# Altium PCB REACTION-CIRCUIT.PcbDoc
Units mm, origin at the board's own origin, x right, y up, seen from the top; angles counter-clockwise.
Board outline 151 x 101.09 mm, 2 copper layers (Top Layer, Bottom Layer); 90 components, 81 nets, 357 pads, 0 vias.
Unrouted connection lines stored in the file: 4.
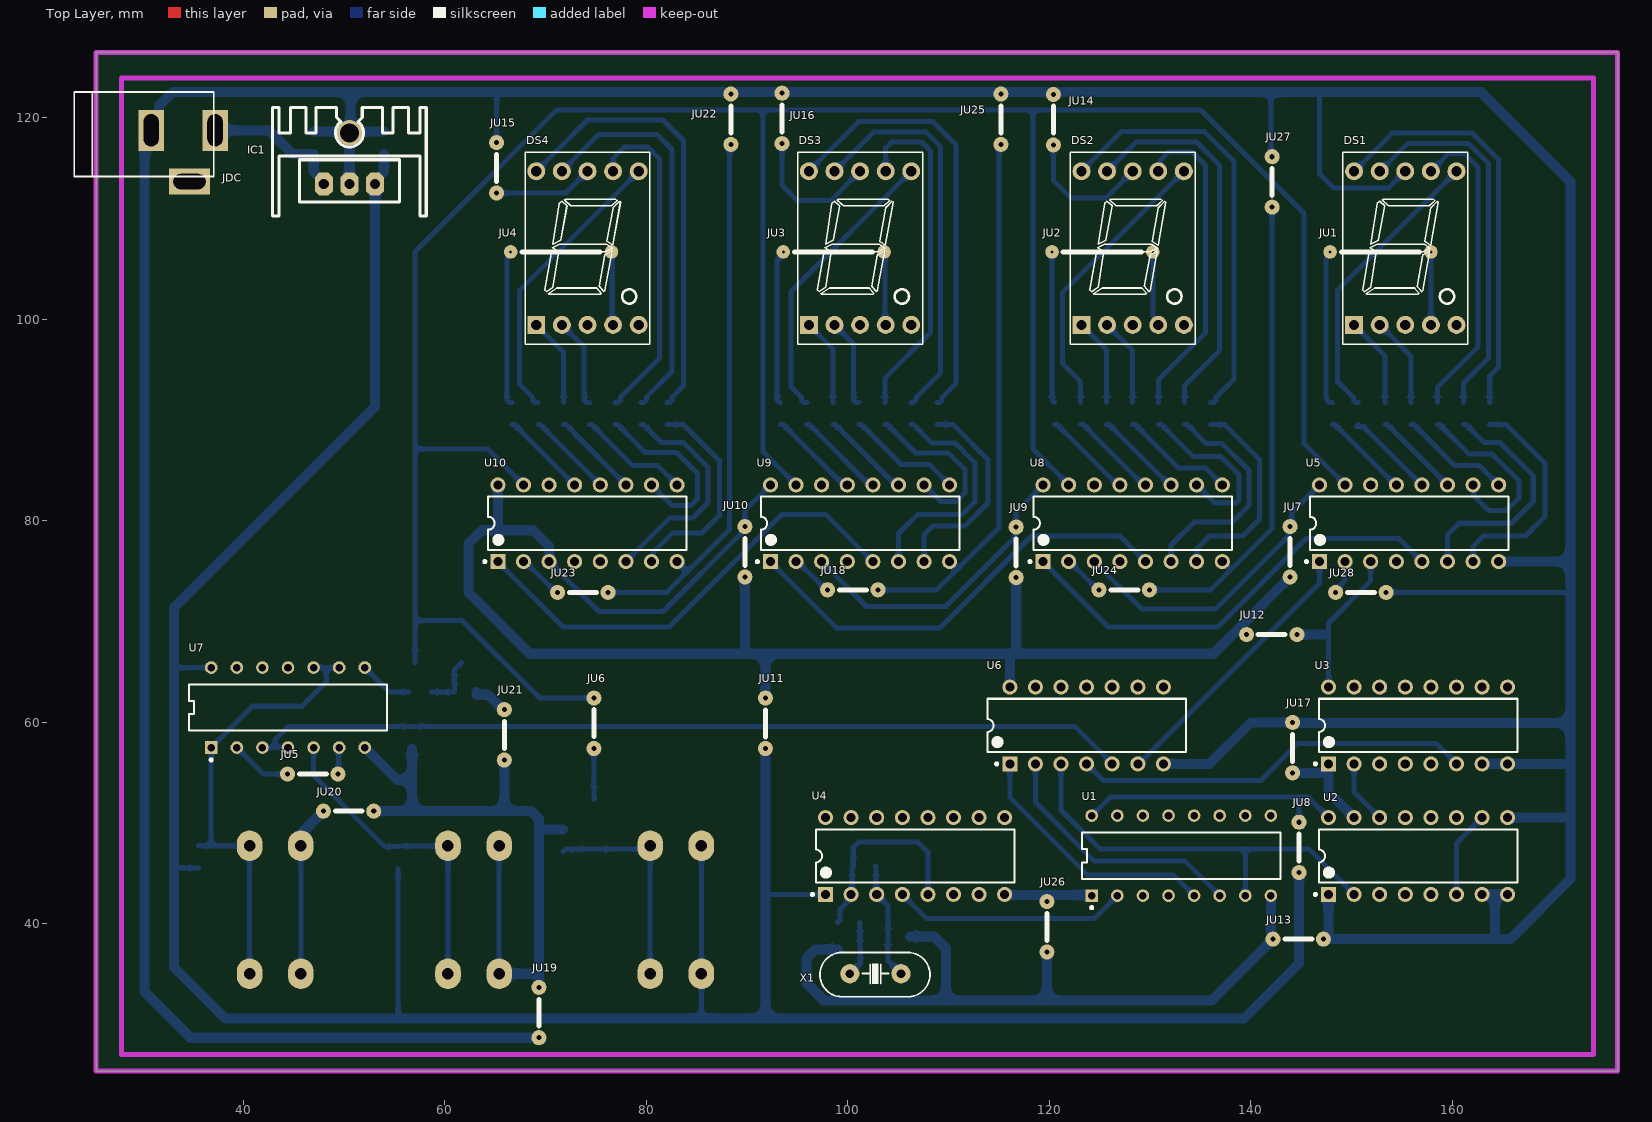
[diagram p0: Top Layer view]
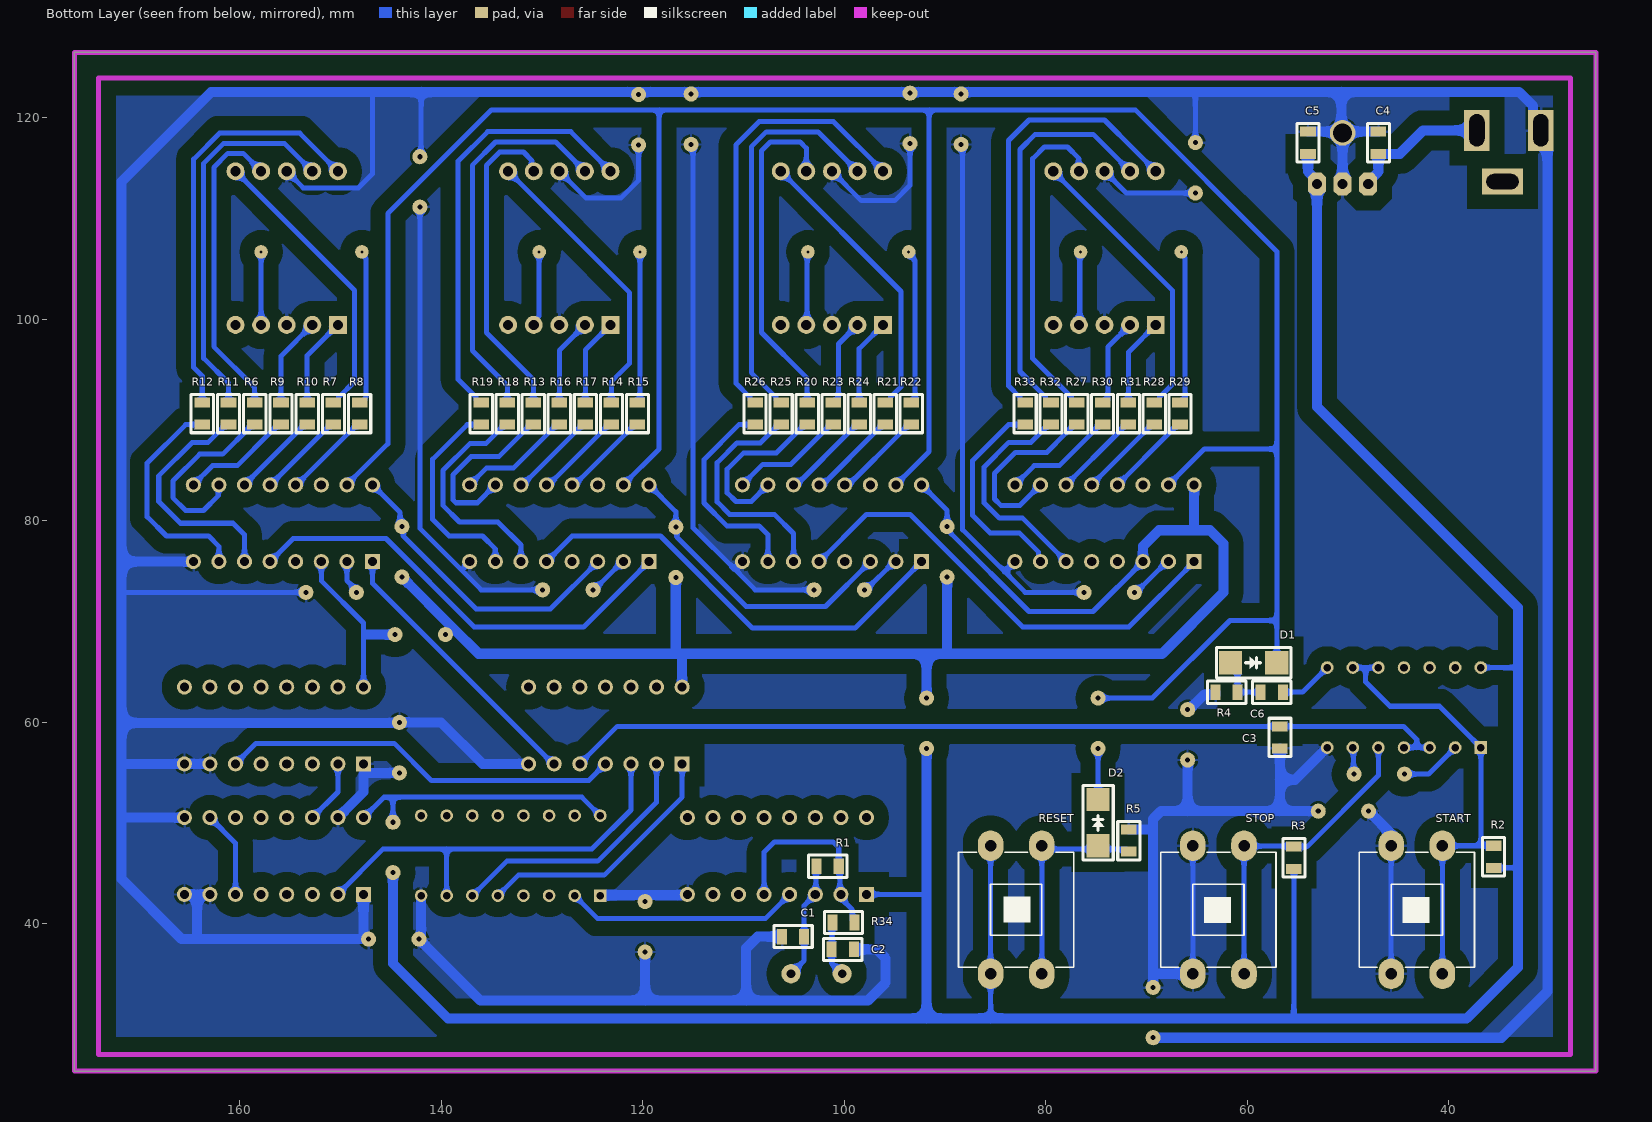
[diagram p1: Bottom Layer view, seen from below]
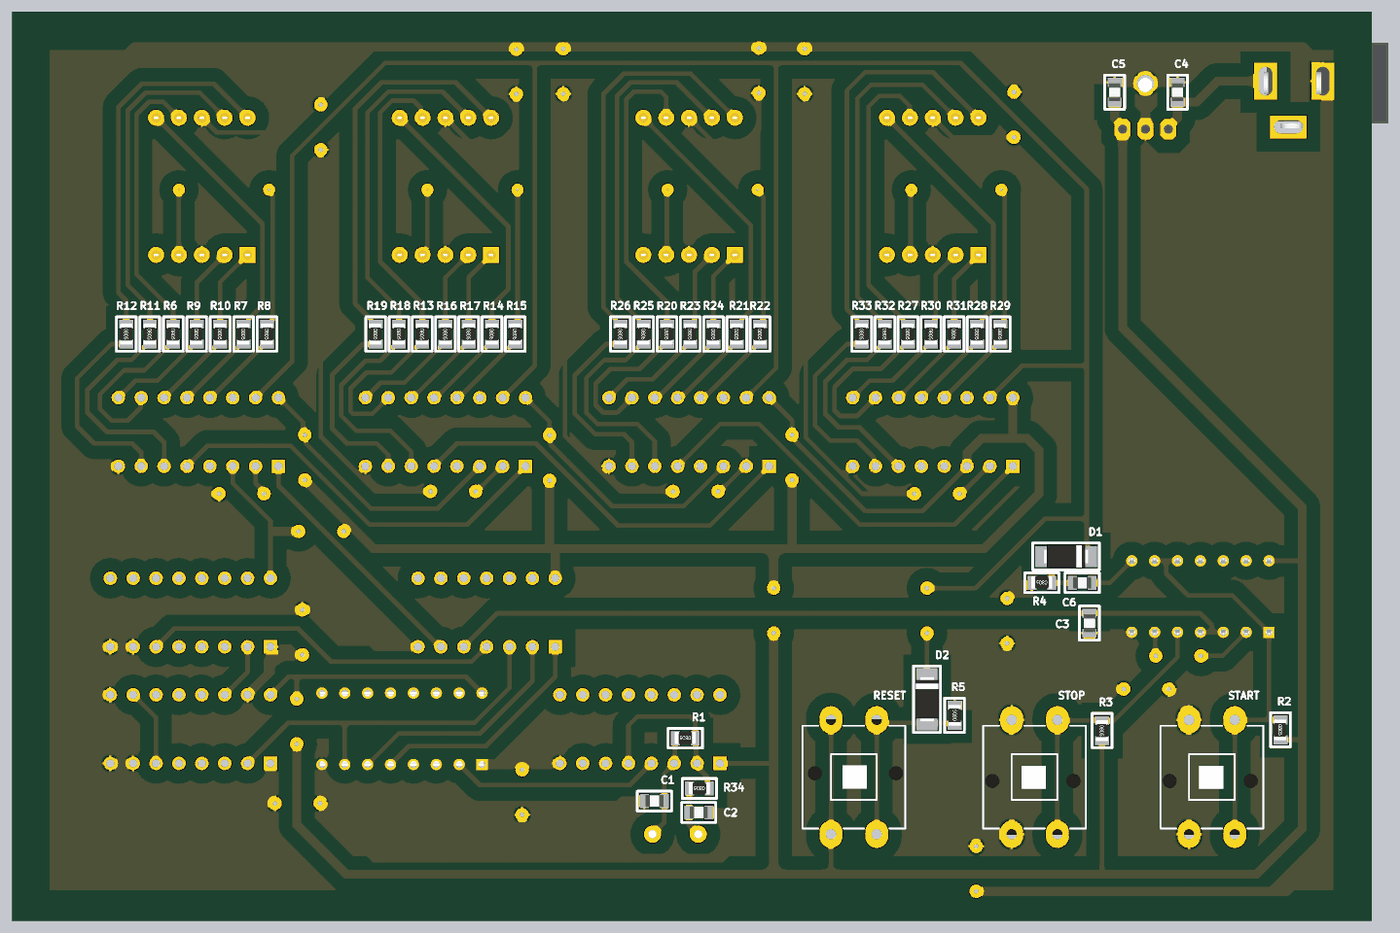
[diagram p2: 3D render of the assembled board from below, using the file's embedded part models]

## Layer stack, top to bottom
Top Solder: solder mask 0.0102, Solder Resist, Dk 3.5
Top Layer: signal copper 0.0356
Dielectric 1: dielectric 0.32, FR-4, Dk 4.8
Bottom Layer: signal copper 0.0356
Bottom Solder: solder mask 0.0102, Solder Resist, Dk 3.5

## Board outline
25.4,25.4 176.403,25.4 176.403,126.492 25.4,126.492

## Design rules (kind name [scope] priority, off if disabled: settings)
Clearance [All] p1: gap=0.5 ignorepadtopadclearanceinfootprint=FALSE
PolygonConnect [All] p1: connectstyle=Relief reliefconductorwidth=0.254 reliefentries=4 polygonreliefangle="90 Angle" airgapwidth=0.254
RoutingVias [All] p1: holewidth=1 width=1.5 viastyle="Through Hole" minholewidth=1 minwidth=1.5 maxholewidth=1 maxwidth=1.5
SolderMaskExpansion [All] p1: expansion=0.102 istentingtop=FALSE
Width [All] p1: maxlimit=1 minlimit=0.4 preferedwidth=0.5
30 further rules are at their usual default settings.

## Classes and differential pairs
component class REACTION-CIRCUIT: JU1 JU2 JU3 JU4 JU5 JU6 JU7 JU8 JU9 JU10 JU11 JU12 JU13 JU14 JU15 JU16 JU17 JU18 JU19 JU20 JU21 JU22 JU23 JU24 JU25 JU26 JU27 JU28
component class REACTION-CIRCUIT-DISPLAY.SchDoc: DS1 DS2 DS3 DS4 R6 R7 R8 R9 R10 R11 R12 R13 R14 R15 R16 R17 R18 R19 R20 R21 R22 R23 R24 R25 R26 R27 R28 R29 R30 R31 R32 R33 U5 U8 U9 U10
component class REACTION-CIRCUIT-CONTROL.SchDoc: C1 C2 C3 C4 C5 C6 D1 D2 IC1 JDC R1 R2 R3 R4 R5 R34 RESET START STOP U1 U2 U3 U4 U6 U7 X1

## Components (designator, comment, footprint, x,y, rotation, side; value= is the part's Value field where it differs from the comment)
C1 "33pF/50V" "Cap 0805(2012)" 106.172,38.735 r180 bottom
C2 "33pF/50V" "Cap 0805(2012)" 99.048,37.465 r0 bottom
C3 "100nF/50V" "Cap 0805(2012)" 56.769,57.404 r90 bottom
C4 "10uF/50V" "Cap 0805(2012)" 46.99,118.618 r270 bottom
C5 "1uF/50V" "Cap 0805(2012)" 53.975,118.618 r270 bottom
C6 "22nF/50V" "Cap 0805(2012)" 58.669,62.992 r180 bottom
D1 "1N4007" 1N4007 61.669,65.913 r180 bottom
D2 "1N4007" 1N4007 74.803,47.752 r90 bottom
DS1 "7SEG" LED7SEG-1-0.56 155.194,106.426 r0 top
DS2 "7SEG" LED7SEG-1-0.56 128.143,106.426 r0 top
DS3 "7SEG" LED7SEG-1-0.56 101.092,106.426 r0 top
DS4 "7SEG" LED7SEG-1-0.56 74.041,106.426 r0 top
IC1 "LM7805" QTO-220H3 48.006,113.411 r0 top
JDC "Jac DC" DC-IN 34.036,116.205 r0 top
JU1 "JUMPER 5MM" "JUMPER 10MM" 157.861,106.68 r180 top
JU2 "JUMPER 5MM" "JUMPER 10MM" 130.269,106.68 r180 top
JU3 "JUMPER 5MM" "JUMPER 10MM" 103.599,106.68 r180 top
JU4 "JUMPER 5MM" "JUMPER 10MM" 76.548,106.68 r180 top
JU5 "JUMPER 5MM" "JUMPER 5MM" 49.403,54.864 r180 top
JU6 "JUMPER 5MM" "JUMPER 5MM" 74.803,62.404 r270 top
JU7 "JUMPER 5MM" "JUMPER 5MM" 143.891,74.422 r90 top
JU8 "JUMPER 5MM" "JUMPER 5MM" 144.78,45.085 r90 top
JU9 "JUMPER 5MM" "JUMPER 5MM" 116.713,74.375 r90 top
JU10 "JUMPER 5MM" "JUMPER 5MM" 89.789,74.422 r90 top
JU11 "JUMPER 5MM" "JUMPER 5MM" 91.821,57.404 r90 top
JU12 "JUMPER 5MM" "JUMPER 5MM" 139.573,68.707 r0 top
JU13 "JUMPER 5MM" "JUMPER 5MM" 147.193,38.481 r180 top
JU14 "JUMPER 5MM" "JUMPER 5MM" 120.396,122.301 r270 top
JU15 "JUMPER 5MM" "JUMPER 5MM" 65.151,112.522 r90 top
JU16 "JUMPER 5MM" "JUMPER 5MM" 93.472,117.428 r90 top
JU17 "JUMPER 5MM" "JUMPER 5MM" 144.145,54.991 r90 top
JU18 "JUMPER 5MM" "JUMPER 5MM" 102.997,73.152 r180 top
JU19 "JUMPER 5MM" "JUMPER 5MM" 69.342,28.702 r90 top
JU20 "JUMPER 5MM" "JUMPER 5MM" 52.959,51.181 r180 top
JU21 "JUMPER 5MM" "JUMPER 5MM" 65.913,56.261 r90 top
JU22 "JUMPER 5MM" "JUMPER 5MM" 88.392,117.348 r90 top
JU23 "JUMPER 5MM" "JUMPER 5MM" 76.2,72.898 r180 top
JU24 "JUMPER 5MM" "JUMPER 5MM" 129.921,73.152 r180 top
JU25 "JUMPER 5MM" "JUMPER 5MM" 115.189,117.348 r90 top
JU26 "JUMPER 5MM" "JUMPER 5MM" 119.761,37.211 r90 top
JU27 "JUMPER 5MM" "JUMPER 5MM" 142.113,111.125 r90 top
JU28 "JUMPER 5MM" "JUMPER 5MM" 153.416,72.898 r180 top
R1 "10K/0805" "Res 0805(2012)" 101.643,45.72 r0 bottom
R2 "10K/0805" "Res 0805(2012)" 35.56,46.652 r270 bottom
R3 "10K/0805" "Res 0805(2012)" 55.372,46.566 r270 bottom
R4 "10K/0805" "Res 0805(2012)" 62.06,62.992 r0 bottom
R5 "10K/0805" "Res 0805(2012)" 71.755,48.262 r90 bottom
R6 "330R/0805" "Res 0805(2012)" 158.496,90.635 r270 bottom
R7 "330R/0805" "Res 0805(2012)" 150.685,90.635 r270 bottom
R8 "330R/0805" "Res 0805(2012)" 148.082,90.635 r270 bottom
R9 "330R/0805" "Res 0805(2012)" 155.892,90.635 r270 bottom
R10 "330R/0805" "Res 0805(2012)" 153.289,90.635 r270 bottom
R11 "330R/0805" "Res 0805(2012)" 161.099,90.635 r270 bottom
R12 "330R/0805" "Res 0805(2012)" 163.703,90.635 r270 bottom
R13 "330R/0805" "Res 0805(2012)" 130.852,90.635 r270 bottom
R14 "330R/0805" "Res 0805(2012)" 123.105,90.635 r270 bottom
R15 "330R/0805" "Res 0805(2012)" 120.523,90.635 r270 bottom
R16 "330R/0805" "Res 0805(2012)" 128.27,90.635 r270 bottom
R17 "330R/0805" "Res 0805(2012)" 125.688,90.635 r270 bottom
R18 "330R/0805" "Res 0805(2012)" 133.435,90.635 r270 bottom
R19 "330R/0805" "Res 0805(2012)" 136.017,90.635 r270 bottom
R20 "330R/0805" "Res 0805(2012)" 103.674,90.635 r270 bottom
R21 "330R/0805" "Res 0805(2012)" 95.927,90.635 r270 bottom
R22 "330R/0805" "Res 0805(2012)" 93.345,90.635 r270 bottom
R23 "330R/0805" "Res 0805(2012)" 101.092,90.635 r270 bottom
R24 "330R/0805" "Res 0805(2012)" 98.51,90.635 r270 bottom
R25 "330R/0805" "Res 0805(2012)" 106.257,90.635 r270 bottom
R26 "330R/0805" "Res 0805(2012)" 108.839,90.635 r270 bottom
R27 "330R/0805" "Res 0805(2012)" 76.92,90.635 r270 bottom
R28 "330R/0805" "Res 0805(2012)" 69.236,90.635 r270 bottom
R29 "330R/0805" "Res 0805(2012)" 66.675,90.635 r270 bottom
R30 "330R/0805" "Res 0805(2012)" 74.358,90.635 r270 bottom
R31 "330R/0805" "Res 0805(2012)" 71.797,90.635 r270 bottom
R32 "330R/0805" "Res 0805(2012)" 79.481,90.635 r270 bottom
R33 "330R/0805" "Res 0805(2012)" 82.042,90.635 r270 bottom
R34 "470R/0805" "Res 0805(2012)" 100.076,40.132 r0 bottom
RESET "SW" SW4B 85.471,47.752 r270 bottom value="Button chip 4 pin"
START "SW" SW4B 40.64,35.052 r90 bottom value="Button chip 4 pin"
STOP "SW" SW4B 60.325,35.052 r90 bottom value="Button chip 4 pin"
U1 "CD4520BE" FP-N0016A-MFG 133.096,46.769 r90 top
U2 "CD4518BE" N0016A 156.591,46.736 r90 top
U3 "CD4518BE" N0016A 156.591,59.69 r90 top
U4 "CD4049UBE" N0016A 106.68,46.736 r90 top
U5 "CD4026BE" N0016A 155.702,79.756 r90 top
U6 "SN74HC08N" N0014A 123.698,59.69 r90 top
U7 "SN74HC00N" FP-N0014A-MFG 44.45,61.468 r90 top
U8 "CD4026BE" N0016A 128.27,79.756 r90 top
U9 "CD4026BE" N0016A 101.219,79.756 r90 top
U10 "CD4026BE" N0016A 74.168,79.756 r90 top
X1 "12Mhz" XT2 102.743,35.052 r180 top value=4Mhz

## Footprints (in the part's own frame and the unit in brackets; to place one, negate y for a bottom-side part, rotate by r counter-clockwise, add the part's x,y. Pads: shape width x height; smd on the part's side, far side on the other; paste and mask are expansions set on the pad)
1N4007 [mm] "DO-214AC"
  rect 2.3x2.3 smd mask+0.05: 1(0,0) 2(4.6,0)
  silkscreen extent -1.4,-1.5 6,1.5, body extent -0.2,-1.35 4.8,1.35, height 2.15
"Cap 0805(2012)" [mm] "Capacitor 0805"
  rect 1x1.55 smd mask+0.1: 1(0,0) 2(2.2,0)
  silkscreen extent -0.8,-1.1 3,1.1, body extent 0.1,-0.65 2.1,0.66, height 0.73
DC-IN [mm] "Jac DC input"
  rect 2.54x4.064 hole 1.5 slot 3.2 at 90 deg: 1(3.175,2.54) 2(-3.175,2.54)
  rect 4.064x2.54 hole 1.5 slot 3.2 at 0 deg: 3(0.635,-2.54)
  silkscreen extent -10.79,-2.03 3.05,6.35, body extent -10.42,-2.67 3.4,6.84, height 11.02
FP-N0014A-MFG [mm]
  rect 1.25x1.25 hole 0.75 paste-1000 mask+0: 1(-3.97,7.62)
  round 1.25 hole 0.75 paste-1000 mask+0: 2(-3.97,5.08) 3(-3.97,2.54) 4(-3.97,0) 5(-3.97,-2.54) 6(-3.97,-5.08) 7(-3.97,-7.62) 8(3.97,-7.62) 9(3.97,-5.08) 10(3.97,-2.54) 11(3.97,0) 12(3.97,2.54) 13(3.97,5.08) 14(3.97,7.62)
  silkscreen extent -5.32,-9.85 2.3,9.85, body extent -4.69,-9.94 4.7,9.94, height 0.25
FP-N0016A-MFG [mm]
  rect 1.25x1.25 hole 0.75 paste-1000 mask+0: 1(-3.97,8.89)
  round 1.25 hole 0.75 paste-1000 mask+0: 2(-3.97,6.35) 3(-3.97,3.81) 4(-3.97,1.27) 5(-3.97,-1.27) 6(-3.97,-3.81) 7(-3.97,-6.35) 8(-3.97,-8.89) 9(3.97,-8.89) 10(3.97,-6.35) 11(3.97,-3.81) 12(3.97,-1.27) 13(3.97,1.27) 14(3.97,3.81) 15(3.97,6.35) 16(3.97,8.89)
  silkscreen extent -5.27,-9.84 2.3,9.84, body extent -4.69,-9.94 4.69,9.94, height 0.25
"JUMPER 5MM" [mm]
  round 1.5 hole 0.5: 1(0,0) 2(5,0)
  silkscreen extent 1.14,0 3.81,0
"JUMPER 10MM" [mm]
  round 1.35 hole 0.3: 1(0,0) 2(10,0)
  silkscreen extent 1.14,0 8.89,0
LED7SEG-1-0.56 [mil]
  rect 70x70 hole 40: 1(-195,-275)
  round 70 hole 40: 2(-95,-275) 3(5,-275) 4(105,-275) 5(205,-275) 6(205,325) 7(105,325) 8(5,325) 9(-95,325) 10(-195,325)
  silkscreen extent -239,-350 249,400, body extent -241,-349 251,399, height 315
N0014A [mm] "DIP, 14-Leads, Body 19.7x6.6mm, Pitch 2.54mm"
  rect 1.5x1.5 hole 0.9: 1(-3.81,7.62)
  round 1.5 hole 0.9: 2(-3.81,5.08) 3(-3.81,2.54) 4(-3.81,0) 5(-3.81,-2.54) 6(-3.81,-5.08) 7(-3.81,-7.62) 8(3.81,-7.62) 9(3.81,-5.08) 10(3.81,-2.54) 11(3.81,0) 12(3.81,2.54) 13(3.81,5.08) 14(3.81,7.62)
  silkscreen extent -3.93,-9.85 2.65,9.85, body extent -3.95,-9.85 3.95,9.85, height 5.08
N0016A [mm] "DIP, 16-Leads, Body 19.7x6.6mm, Pitch 2.54mm"
  rect 1.5x1.5 hole 0.9: 1(-3.81,8.89)
  round 1.5 hole 0.9: 2(-3.81,6.35) 3(-3.81,3.81) 4(-3.81,1.27) 5(-3.81,-1.27) 6(-3.81,-3.81) 7(-3.81,-6.35) 8(-3.81,-8.89) 9(3.81,-8.89) 10(3.81,-6.35) 11(3.81,-3.81) 12(3.81,-1.27) 13(3.81,1.27) 14(3.81,3.81) 15(3.81,6.35) 16(3.81,8.89)
  silkscreen extent -3.93,-9.85 2.65,10.31, body extent -3.95,-9.85 3.95,9.85, height 5.08
QTO-220H3 [mil] "TO-220 1-2-3"
  oct 70x90 hole 40: 1(0,0) 2(100,0) 3(200,0)
  round 100 hole 75: 2(100,200)
  silkscreen extent -200,-125 400,300, body extent -190,-102 392,323, height 984
"Res 0805(2012)" [mm] "Resistor 0805"
  rect 1x1.55 smd mask+0.1: 1(-1.1,0) 2(1.1,0)
  silkscreen extent -1.91,-1.1 1.9,1.1, body extent -1.15,-0.69 1.15,0.66, height 0.76
SW4B [mil] "SW button 4pin, 450 x 450 mil"
  oval 120x100 hole 45: 1(0,200) 2(500,0) 3(500,200) 4(0,0)
  silkscreen extent 25,-125 475,325, body extent -3,-129 469,343, height 169
XT2 [mil] "Footpin for Crystal 2 pin"
  round 75 hole 34: 1(-100,0) 2(100,0)
  silkscreen extent -213,-83 217,90, body extent -216,-87 216,90, height 144

## Part data
C1 C2 C3 C4 C5 C6: library part CAP_CER_1nF_50V_NPOL, "Ceramic Capacitor 1nF/50V (+-20% TH)/(+10%SMD)"
D1 D2: "Diode LS 1A 1000V DO-41"
DS1 DS2 DS3 DS4: library part LED7SEG-1, "14.2 mm General Purpose Blue 7-Segment Display: CC, RH DP, Gray Surface", Colour=Blue, PackageDocument=24-Sep-2002, ComponentLink1Description="Manufacturer Link", ComponentLink1URL=http://www.agilent.com/, DatasheetDocument=24-Sep-2002, LatestRevisionDate=17-Dec-2003, LatestRevisionNote="Schematic revised, PCB Footprint replaced.", MinimumIntensity="2020 ucd", Note="IF = 10 mA", PackageReference=H, Published=8-Jun-2000, Publisher="Altium Limited"
IC1: library part LM78xx, "On ap +, from + 5 to + 24VDC"
JDC: library part DCIN, "Jac DC input"
R1 R2 R3 R4 R5 R6 R7 R8 R9 R10 R11 R12 R13 R14 R15 R16 R17 R18 R19 R20 R21 R22 R23 R24 R25 R26 R27 R28 R29 R30 R31 R32 R33 R34: library part "Resistor 0805", "Resistor 0805"
RESET START STOP: library part SW4, "Switch button 4 pin"
U1: library part CMP-1623-00555-3, "IC DUAL BINARY UP COUNTER 16-DIP", Case/Package=PDIP, Frequency=8MHz, Input Capacitance=5pF, Max Operating Temperature=125°C, Max Supply Voltage=18V, Min Operating Temperature=-55°C, Min Supply Voltage=3V, Package Quantity=25, Power Dissipation=500mW, Quiescent Current=100uA, Contact Plating=Gold, Direction=Up, Lead Free="Lead Free", Logic Function=Counter, Mount="Through Hole", Number of Bits=4, Number of Bits per Element=4, Number of Circuits=2, Number of Elements=2, Number of Pins=16, Packaging=Rail/Tube, Propagation Delay=650ns, Radiation Hardening=No, REACH SVHC="No SVHC", Reset=Asynchronous, RoHS Compliant=Yes, Sync/Async=Synchronous, Turn-On Delay Time=650ns, Weight=0.03357oz
U2 U3: library part CMP-1623-00558-2, "CMOS Dual BCD Up-Counter, N0016A, TUBE", F @ Nom Voltage(Max)(Mhz)=8, Generic Part Number=CD4518B, ICC @ Nom Voltage(Max)(mA)=0.03, Manufacturer="Texas Instruments", Operating Temperature Range(C)="-55 to 125", Rating=Catalog, tpd @ Nom Voltage(Max)(ns)=230, Voltage(Nom)(V)=5,10,15, Bits(#)=4, Code_JEDEC=MS-001, DatasheetVersion=SCHS076D, Function=Counter, Input Type=CMOS, Inputs=1, Output Drive (IOL/IOH)(Max)(mA)=1.5/-1.5, Output Type=CMOS, PackageReference=N0016A, Schmitt Trigger=No, Technology Family=CD4000, Type=Other, VCC(Max)(V)=18, VCC(Min)(V)=3
U4: library part CMP-1615-00914-2, "CMOS Hex Inverting Buffer/Converter, N0016A, TUBE", F @ Nom Voltage(Max)(Mhz)=12, Generic Part Number=CD4049UB, ICC @ Nom Voltage(Max)(mA)=0.03, Manufacturer="Texas Instruments", Operating Temperature Range(C)="-55 to 125", Rating=Military, tpd @ Nom Voltage(Max)(ns)=120, Voltage(Nom)(V)=5, Bits(#)=6, Code_JEDEC=MS-001, DatasheetVersion=SCHS046I, Input Type=CMOS, Output Drive (IOL/IOH)(Max)(mA)=-1.2/5.2, Output Type=CMOS, PackageReference=N0016A, Schmitt Trigger=No, Technology Family=CD4000, VCC(Max)(V)=18, VCC(Min)(V)=3
U5 U8 U9 U10: library part CMP-1623-00561-2, "CMOS Decade Counter/Divider with Decoded 7-Segment Display Outputs and Display Enable, N0016A, TUBE", F @ Nom Voltage(Max)(Mhz)=8, Generic Part Number=CD4026B, ICC @ Nom Voltage(Max)(mA)=0.03, Manufacturer="Texas Instruments", Operating Temperature Range(C)="-55 to 125", Rating=Catalog, tpd @ Nom Voltage(Max)(ns)=250, Voltage(Nom)(V)=5,10,15, Bits(#)=7, Code_JEDEC=MS-001, DatasheetVersion=SCHS031B, Function=Counter, Input Type=CMOS, Inputs=1, Output Drive (IOL/IOH)(Max)(mA)=1.5/-1.5, Output Type=CMOS, PackageReference=N0016A, Schmitt Trigger=No, Technology Family=CD4000, Type=Decade, VCC(Max)(V)=18, VCC(Min)(V)=3
U6: library part CMP-0777-00250-3, "Quadruple 2-Input Positive-AND Gates, N0014A, TUBE", F @ Nom Voltage(Max)(Mhz)=70, Generic Part Number=SN74HC08, ICC @ Nom Voltage(Max)(mA)=0.02, Manufacturer="Texas Instruments", Operating Temperature Range(C)="-40 to 85", Rating=Catalog, tpd @ Nom Voltage(Max)(ns)=28, Voltage(Nom)(V)=5, Bits(#)=4, DatasheetVersion=SCLS081F, Input Type=CMOS, Output Type=CMOS, PackageReference=N0014A, Schmitt Trigger=No, Technology Family=HC, VCC(Max)(V)=6, VCC(Min)(V)=2
U7: library part CMP-1627-00482-3, "IC GATE NAND 4CH 2-INP 14DIP", Case/Package=PDIP, High Level Output Current=-5.2mA, Low Level Output Current=5.2mA, Max Operating Temperature=85°C, Max Output Current=4mA, Max Supply Voltage=6V, Min Operating Temperature=-40°C, Min Supply Voltage=2V, Operating Supply Voltage=5V, Package Quantity=25, Quiescent Current=2uA, Contact Plating=Gold, Height=4.57mm, Lead Free="Lead Free", Length=19.3mm, Logic Function=NAND, Mount="Through Hole", Number of Bits=4, Number of Circuits=4, Number of Elements=4, Number of Gates=4, Number of Input Lines=2, Number of Inputs=2, Number of Output Lines=1, Number of Outputs=1, Number of Pins=14, Output Current=5.2mA, Packaging=Rail/Tube, Propagation Delay=15ns, Radiation Hardening=No, REACH SVHC="No SVHC", Schmitt Trigger Input=No, Turn-On Delay Time=20ns, Weight=0.032734oz, Width=6.35mm
X1: library part XT2, "Crystal, 32.768 KHz, -40 to 85 degC, 3.2 x 1.5 x 0.9 mm SMD"

## Nets (pads, with @x,y where several pads share a name; then routed paths per layer and width w, separated by ;. In a path a pad name is that pad's centre, name@x,y a point inside that pad or via, vN(x,y) a via of type N, cw(c..) or ccw(c..) an arc to the next point about the centre after c; other vN are vias at no path point)
5V: C5.2 IC1.3 JU7.1 JU7.2 JU8.1 JU8.2 JU9.1 JU9.2 JU10.1 JU10.2 JU11.1 JU11.2 JU12.1 JU12.2 R2.2 R3.2 RESET.2 RESET.4 U1.16 U2.16 U3.16 U4.1 U5.3 U5.16 U6.14 U7.14 U8.3 U8.16 U9.3 U9.16 U10.3 U10.16 | length 552.6
  Bottom Layer w0.5: 33.147,45.552 R2.2 ; 33.147,65.438 U7.14 ; 55.372,30.607 R3.2 ; U10.3 75.311,70.993 81.661,70.993 89.379,78.711 89.379,78.741 89.789,79.151 89.789,81.026 U9.16 ; 85.471,30.607 RESET.2 RESET.4 ; 91.821,43.053 91.948,42.926 U4.1 ; U9.3 101.854,71.501 109.728,71.501 116.597,78.37 116.597,79.259 JU9.2 116.713,80.899 U8.16 ; U1.16 126.045,52.578 144.78,52.578 ; U8.3 129.159,71.247 136.525,71.247 143.735,78.457 143.735,79.266 144.082,79.613 144.082,80.836 U5.16 ; JU8.2 144.78,52.578 ; U2.16 145.669,52.578 144.78,52.578 ; U3.16 147.701,69.85 151.892,74.041 U5.3
  Bottom Layer w1: C5.2 53.975,114.64 53.086,113.751 IC1.3 53.086,91.313 33.147,71.374 33.147,65.438 33.147,45.552 33.147,35.687 38.227,30.607 55.372,30.607 85.471,30.607 91.821,30.607 ; U10.16 65.278,79.184 65.151,79.057 ; U10.3 70.358,77.47 68.77,79.057 65.151,79.057 ; JU10.1 89.789,67.183 90.17,66.802 ; JU11.1 91.821,43.053 91.821,30.607 ; JU11.2 91.791,62.434 91.821,62.465 91.821,66.802 ; U6.14 116.078,66.802 ; JU9.1 116.713,66.929 116.586,66.802 ; JU12.1 139.446,68.707 138.811,69.342 ; JU7.1 138.811,69.342 ; JU12.2 147.447,68.707 ; JU8.1 144.78,36.068 139.319,30.607 91.821,30.607 ; 65.151,79.057 63.691,79.057 62.357,77.724 62.357,72.898 68.453,66.802 89.789,66.802 90.17,66.802 ; 90.17,66.802 91.821,66.802 ; 91.821,66.802 116.078,66.802 ; 116.078,66.802 116.586,66.802 ; 116.586,66.802 136.271,66.802 138.811,69.342
12V: C4.2 IC1.1 JDC.1 | length 14.2
  Bottom Layer w1: JDC.1 42.545,118.745 44.872,116.418 C4.2 46.99,114.64 48.006,113.624 IC1.1
CLK_1KHz: U5.1 U6.6 | length 27.6
  Bottom Layer w0.5: U6.6 128.905,55.88 146.812,73.787 U5.1
CLK_12MHz: U1.2 U4.4 | length 23.3
  Bottom Layer w0.5: U4.4 107.823,40.513 124.46,40.513 U1.2
GND: C1.1 C2.1 C3.1 C4.1 C5.1 DS1.3 DS1.8 DS2.3 DS2.8 DS3.3 DS3.8 DS4.3 DS4.8 IC1.2 JDC.2 JU13.1 JU13.2 JU14.1 JU14.2 JU15.1 JU15.2 JU16.1 JU16.2 JU17.1 JU17.2 JU18.1 JU18.2 JU19.1 JU19.2 JU20.1 JU20.2 JU21.1 JU21.2 JU22.1 JU22.2 JU23.1 JU23.2 JU24.1 JU24.2 JU25.1 JU25.2 JU26.1 JU26.2 JU27.1 JU27.2 JU28.1 JU28.2 R4.2 R5.2 START.1 START.3 STOP.1 STOP.3 U1.1 U1.8 U2.1 U2.7 U2.8 U2.9 U2.15 U3.1 U3.7 U3.8 U4.8 U5.2 U5.8 U6.7 U7.7 U8.2 U8.8 U9.2 U9.8 U10.2 U10.8 | length 901.4
  Bottom Layer w0.5: START.1 START.3 ; JU15.1 72.009,112.522 DS4.8 ; JU15.2 65.151,122.555 ; STOP.1 STOP.3 ; U10.2 67.985,75.946 71.033,72.898 JU23.2 ; JU23.1 82.042,72.898 84.074,74.93 ; U10.8 84.074,74.93 ; JU22.1@88.249,117.586 88.249,79.105 84.074,74.93 ; JU16.1 93.472,113.284 94.996,111.76 98.298,111.76 DS3.8 ; U9.2 95.036,75.946 97.83,73.152 JU18.2 ; JU18.1 108.839,73.152 110.871,75.184 ; U9.8 110.871,75.184 ; JU25.1@114.998,117.262 114.998,79.311 110.871,75.184 ; JU14.2 120.396,113.792 122.174,112.014 125.603,112.014 DS2.8 ; U8.2 122.023,75.946 124.817,73.152 JU24.2 ; JU24.1 136.017,73.152 138.049,75.184 ; U8.8 137.922,75.184 138.049,75.184 ; 141.986,122.555 141.986,116.252 JU27.2 ; JU27.1 142.113,79.248 138.049,75.184 ; 146.685,122.555 146.812,122.428 146.812,114.427 148.197,113.042 153.682,113.042 DS1.8 ; JU28.2 148.416,73.147 149.352,74.083 U5.2 ; JU28.1 171.45,72.898 171.704,72.644
  Bottom Layer w1: START.3 46.015,48.047 46.015,49.237 JU20.2 ; C4.1 IC1.2@50.673,118.618 ; IC1.2@50.546,113.411 50.546,118.491 IC1.2@50.673,118.618 ; U7.7 55.275,54.292 56.769,54.292 ; JU20.1 56.769,51.181 ; C5.1 IC1.2@50.673,118.618 ; C3.1 56.769,54.292 ; R4.2 63.16,62.717 64.322,62.717 65.778,61.261 JU21.2 ; STOP.1 69.088,35.052 69.342,35.306 ; JU21.1 65.913,51.181 ; JU19.1 34.798,28.702 30.226,33.274 30.226,118.11 31.631,119.515 31.631,121.166 33.02,122.555 50.673,122.555 ; JU19.2 69.342,35.306 ; R5.2 69.383,49.362 69.342,49.403 ; C2.1 96.774,37.465 95.885,36.576 95.885,34.163 97.663,32.385 109.728,32.385 ; C1.1 108.585,38.735 109.728,37.592 109.728,32.385 ; U4.8 115.633,42.862 JU26.2@119.761,42.862 ; JU26.1 119.761,32.385 ; JU26.2 119.857,42.307 JU26.2@119.857,42.831 ; JU26.2@119.857,42.862 124.142,42.862 U1.1 ; U6.7 135.89,55.88 140.001,59.991 JU17.2 144.192,59.944 171.704,59.944 ; U1.8 141.986,38.823 142.193,38.616 JU13.2 136.097,32.385 119.761,32.385 ; JU17.1 147.574,54.991 147.701,54.864 147.701,53.086 U2.15 ; U2.1 147.701,38.735 147.955,38.481 163.957,38.481 ; U2.7 164.211,42.926 ; U3.7 U3.8 171.577,55.88 171.704,55.753 ; U5.8 171.704,75.946 ; U2.8 164.211,42.926 ; U2.9 171.577,50.546 171.704,50.673 ; IC1.2@50.673,118.618 50.673,122.555 ; 50.673,122.555 65.151,122.555 88.392,122.555 93.472,122.555 115.189,122.555 120.396,122.555 141.986,122.555 146.685,122.555 162.814,122.555 171.704,113.665 171.704,75.946 ; 56.769,51.181 65.913,51.181 ; 56.769,51.181 56.769,54.292 ; 65.913,51.181 68.58,51.181 69.342,50.419 69.342,49.403 ; 69.342,35.306 69.342,49.403 ; 109.728,32.385 119.761,32.385 ; 163.957,38.481 165.735,38.481 171.704,44.45 171.704,50.673 ; 163.957,38.481 164.211,38.735 164.211,42.926 ; 171.704,50.673 171.704,55.753 ; 171.704,55.753 171.704,59.944 ; 171.704,59.944 171.704,72.644 171.704,75.946
NetC1_2: C1.2 R1.2 U4.3 X1.1 | length 11.7
  Bottom Layer w0.5: R1.2 102.806,45.657 102.806,42.989 U4.3 103.972,41.824 C1.2 103.972,36.363 X1.1
NetC2_2: C2.2 R34.2 X1.2 | length 5.5
  Bottom Layer w0.5: X1.2 101.248,36.097 C2.2 101.212,37.501 101.212,40.096 R34.2
NetC6_1: C6.1 D1.1 R4.1 | length 5.5
  Bottom Layer w0.5: C6.1 R4.1 60.96,65.204 D1.1
NetC6_2: C6.2 U7.8 | length 5.4
  Bottom Layer w0.5: U7.8 54.516,62.992 C6.2
NetD2_1: D2.1 R5.1 RESET.1 RESET.3 | length 21.6
  Bottom Layer w0.5: R5.1 72.005,47.412 74.803,47.412 80.051,47.412 RESET.1 RESET.3
NetDS1_1: DS1.1 R10.1 | length 9.1
  Bottom Layer w0.4: DS1.1@150.241,99.314 DS1.1
  Bottom Layer w0.5: DS1.1 153.289,96.393 R10.1
NetDS1_2: DS1.2 R9.1 | length 9
  Bottom Layer w0.5: DS1.2 155.892,96.33 R9.1
NetDS1_4: DS1.4 JU1.1 JU1.2 R8.1 | length 23
  Bottom Layer w0.5: JU1.2 147.861,106.45 147.447,106.036 147.447,92.278 147.557,92.168 147.557,91.985 147.807,91.735 R8.1 ; DS1.4@157.861,99.187 DS1.4 JU1.1
NetDS1_6: DS1.6 R7.1 | length 28.9
  Bottom Layer w0.5: R7.1 150.41,91.735 150.16,91.985 150.16,92.26 148.59,93.83 148.59,102.87 DS1.6@160.274,114.554 ; DS1.6@160.401,114.427 DS1.6
NetDS1_7: DS1.7 R6.1 | length 31
  Bottom Layer w0.5: DS1.7 159.639,116.459 161.163,116.459 162.56,115.062 162.56,97.282 158.496,93.218 R6.1
NetDS1_9: DS1.9 R11.1 | length 37.5
  Bottom Layer w0.5: DS1.9 155.559,117.459 161.577,117.459 163.56,115.476 163.56,96.123 161.099,93.662 R11.1
NetDS1_10: DS1.10 R12.1 | length 41.6
  Bottom Layer w0.5: DS1.10 150.241,114.935 150.495,114.935 154.019,118.459 161.991,118.459 164.56,115.89 164.56,95.218 163.703,94.361 R12.1
NetDS2_1: DS2.1 R17.1 | length 8.7
  Bottom Layer w0.5: DS2.1 125.688,96.943 R17.1
NetDS2_2: DS2.2 R16.1 | length 8.8
  Bottom Layer w0.5: DS2.2 128.27,96.901 R16.1
NetDS2_4: DS2.4 JU2.1 JU2.2 R15.1 | length 22.5
  Bottom Layer w0.5: JU2.2 120.269,91.985 120.519,91.735 R15.1 ; JU2.1 130.269,100.328 130.81,99.787 DS2.4
NetDS2_6: DS2.6 R14.1 | length 28.7
  Bottom Layer w0.5: R14.1 123.105,93.811 121.285,95.631 121.285,102.616 DS2.6
NetDS2_7: DS2.7 R13.1 | length 32
  Bottom Layer w0.5: DS2.7 131.024,114.895 131.024,115.784 131.826,116.586 134.183,116.586 135.509,115.26 135.509,98.679 130.852,94.022 R13.1
NetDS2_9: DS2.9 R18.1 | length 38.3
  Bottom Layer w0.5: DS2.9 128.635,117.586 134.597,117.586 136.906,115.277 136.906,96.901 133.435,93.43 R18.1
NetDS2_10: DS2.10 R19.1 | length 43
  Bottom Layer w0.5: DS2.10 127.127,118.618 135.382,118.618 138.303,115.697 138.303,94.021 136.542,92.26 136.542,91.985 136.292,91.735 R19.1
NetDS3_1: DS3.1 R24.1 | length 8.7
  Bottom Layer w0.5: DS3.1 98.51,97.07 R24.1
NetDS3_2: DS3.2 R23.1 | length 8.9
  Bottom Layer w0.5: DS3.2 100.567,97.553 100.567,91.985 100.817,91.735 R23.1
NetDS3_4: DS3.4 JU3.1 JU3.2 R22.1 | length 22.7
  Bottom Layer w0.5: R22.1 93.214,91.735 92.964,91.985 92.964,105.815 93.599,106.45 JU3.2 ; JU3.1 103.679,106.6 103.679,99.521 DS3.4
NetDS3_6: DS3.6 R21.1 | length 28.7
  Bottom Layer w0.5: R21.1 95.652,91.735 95.402,91.985 95.402,92.26 94.361,93.301 94.361,102.743 DS3.6
NetDS3_7: DS3.7 R20.1 | length 34.2
  Bottom Layer w0.5: R20.1 103.674,94.147 108.204,98.676 108.204,116.713 107.315,117.602 104.394,117.602 103.759,116.967 DS3.7
NetDS3_9: DS3.9 R25.1 | length 39.5
  Bottom Layer w0.5: DS3.9 102.6,118.602 107.729,118.602 109.22,117.111 109.22,94.698 106.782,92.26 106.782,91.985 106.532,91.735 R25.1
NetDS3_10: DS3.10 R26.1 | length 44.1
  Bottom Layer w0.5: DS3.10 101.06,119.602 108.451,119.602 110.744,117.309 110.744,93.64 109.364,92.26 109.364,91.985 109.114,91.735 R26.1
NetDS4_1: DS4.1 R31.1 | length 8.8
  Bottom Layer w0.5: DS4.1 71.797,96.732 R31.1
NetDS4_2: DS4.2 R30.1 | length 9
  Bottom Layer w0.5: DS4.2 73.833,97.236 73.833,91.985 74.083,91.735 R30.1
NetDS4_4: DS4.4 JU4.1 JU4.2 R29.1 | length 22.8
  Bottom Layer w0.5: JU4.2 66.548,106.45 66.167,106.069 66.167,91.985 66.417,91.735 R29.1 ; JU4.1 76.628,106.6 76.628,99.521 DS4.4
NetDS4_6: DS4.6 R28.1 | length 28.7
  Bottom Layer w0.5: R28.1 68.961,91.735 68.711,91.985 68.711,92.26 67.437,93.534 67.437,102.87 DS4.6
NetDS4_7: DS4.7 R27.1 | length 33
  Bottom Layer w0.5: DS4.7 76.732,114.705 76.732,115.975 77.851,117.094 80.137,117.094 81.296,115.935 81.296,96.111 77.445,92.26 77.445,91.985 77.195,91.735 R27.1
NetDS4_9: DS4.9 R32.1 | length 39.6
  Bottom Layer w0.5: DS4.9 75.295,118.348 81.042,118.348 82.55,116.84 82.55,94.804 80.006,92.26 80.006,91.985 79.756,91.735 R32.1
NetDS4_10: DS4.10 R33.1 | length 44.4
  Bottom Layer w0.5: DS4.10 71.179,116.772 74.168,119.761 81.661,119.761 83.693,117.729 83.693,93.386 82.567,92.26 82.567,91.985 82.317,91.735 R33.1
NetR1_1: R1.1 R34.1 U4.2 U4.5 | length 20.3
  Bottom Layer w0.5: R34.1 99.226,40.382 99.226,41.441 100.139,42.354 100.139,42.735 U4.2 100.436,43.032 100.436,45.614 R1.1 100.543,47.584 101.092,48.133 106.934,48.133 107.95,47.117 U4.5
NetR2_1: R2.1 START.2 START.4 U7.1 U7.9 U7.10 | length 45.6
  Bottom Layer w0.5: R2.1 36.83,47.752 ; START.4 START.2 36.83,47.752 ; U7.10 48.26,65.438 ; U7.9 48.26,65.438 ; 36.83,47.752 U7.1 40.927,61.595 45.847,61.595 48.26,64.008 48.26,65.438
NetR3_1: R3.1 STOP.2 STOP.4 U7.5 | length 31.8
  Bottom Layer w0.5: U7.5 46.99,54.737 54.061,47.666 R3.1 55.415,47.709 60.282,47.709 STOP.2 STOP.4
NetR6_2: R6.2 U5.10 | length 18.9
  Bottom Layer w0.5: R6.2 158.771,89.535 159.021,89.285 159.021,89.264 161.671,86.614 163.957,86.614 166.624,83.947 166.624,82.296 165.354,81.026 163.576,81.026 162.105,82.497 162.105,83.513 U5.10
NetR7_2: R7.2 U5.12 | length 9.1
  Bottom Layer w0.5: R7.2 150.495,89.345 151.151,89.345 151.764,88.731 151.764,88.724 156.922,83.566 U5.12
NetR8_2: R8.2 U5.13 | length 8.8
  Bottom Layer w0.5: R8.2 148.357,89.535 149.16,88.731 149.16,88.724 154.319,83.566 U5.13
NetR9_2: R9.2 U5.9 | length 11.2
  Bottom Layer w0.5: R9.2 156.167,89.535 156.971,88.731 156.971,88.724 160.224,85.471 162.687,85.471 U5.9
NetR10_2: R10.2 U5.11 | length 8.7
  Bottom Layer w0.5: R10.2 153.564,89.535 154.367,88.731 154.367,88.711 U5.11
NetR11_2: R11.2 U5.6 | length 24.1
  Bottom Layer w0.5: U5.6 159.512,78.613 160.655,79.756 165.862,79.756 168.021,81.915 168.021,84.455 164.719,87.757 163.145,87.757 162.178,88.724 162.178,88.731 161.374,89.535 R11.2
NetR12_2: R12.2 U5.7 | length 22.2
  Bottom Layer w0.5: U5.7 162.052,77.47 163.068,78.486 167.259,78.486 169.164,80.391 169.164,85.725 165.354,89.535 R12.2
NetR13_2: R13.2 U8.10 | length 17.6
  Bottom Layer w0.5: R13.2 131.127,89.535 131.91,88.753 131.91,88.724 134.274,86.36 137.033,86.36 138.827,84.566 138.827,82.081 138.534,81.788 136.398,81.788 U8.10
NetR14_2: R14.2 U8.12 | length 8.9
  Bottom Layer w0.5: R14.2 123.38,89.535 124.163,88.753 124.163,88.724 129.321,83.566 U8.12
NetR15_2: R15.2 U8.13 | length 9
  Bottom Layer w0.5: R15.2 120.798,89.535 121.58,88.753 121.58,88.724 126.739,83.566 U8.13
NetR16_2: R16.2 U8.9 | length 11.4
  Bottom Layer w0.5: R16.2 128.545,89.535 129.327,88.753 129.327,88.724 132.835,85.217 135.509,85.217 U8.9
NetR17_2: R17.2 U8.11 | length 8.9
  Bottom Layer w0.5: R17.2 125.963,89.535 126.745,88.753 126.745,88.724 131.903,83.566 U8.11
NetR18_2: R18.2 U8.6 | length 22.8
  Bottom Layer w0.5: U8.6 132.08,77.597 134.366,79.883 138.176,79.883 139.827,81.534 139.827,84.98 137.154,87.653 135.563,87.653 134.492,88.724 134.492,88.753 133.71,89.535 R18.2
NetR19_2: R19.2 U8.7 | length 20.9
  Bottom Layer w0.5: U8.7 134.62,77.216 135.89,78.486 139.192,78.486 140.843,80.137 140.843,86.106 137.414,89.535 R19.2
NetR20_2: R20.2 U9.10 | length 17.2
  Bottom Layer w0.5: R20.2 103.949,89.535 104.732,88.753 104.732,88.724 106.715,86.741 109.982,86.741 111.609,85.114 111.609,82.78 110.744,81.915 109.22,81.915 U9.10
NetR21_2: R21.2 U9.12 | length 9.1
  Bottom Layer w0.5: R21.2 96.202,89.535 96.985,88.753 96.985,88.724 101.952,83.757 102.298,83.757 U9.12
NetR22_2: R22.2 U9.13 | length 9.1
  Bottom Layer w0.5: R22.2 93.62,89.535 94.402,88.753 94.402,88.724 99.369,83.757 99.758,83.757 U9.13
NetR23_2: R23.2 U9.9 | length 11.5
  Bottom Layer w0.5: R23.2 101.367,89.535 102.149,88.753 102.149,88.724 105.276,85.598 108.077,85.598 U9.9
NetR24_2: R24.2 U9.11 | length 9
  Bottom Layer w0.5: R24.2 98.785,89.535 99.567,88.753 99.567,88.724 104.534,83.757 104.838,83.757 U9.11
NetR25_2: R25.2 U9.6 | length 23.5
  Bottom Layer w0.5: U9.6 105.029,78.74 106.934,80.645 111.379,80.645 112.609,81.875 112.609,85.765 110.633,87.741 108.297,87.741 107.314,88.724 107.314,88.753 106.532,89.535 R25.2
NetR26_2: R26.2 U9.7 | length 21.1
  Bottom Layer w0.5: U9.7 107.569,78.613 108.458,79.502 111.65,79.502 113.919,81.771 113.919,86.067 110.451,89.535 R26.2
NetR27_2: R27.2 U10.10 | length 18.4
  Bottom Layer w0.5: R27.2 77.195,89.535 77.956,88.774 77.956,88.724 79.9,86.78 83.019,86.78 85.09,84.709 85.09,82.169 84.455,81.534 82.55,81.534 U10.10
NetR28_2: R28.2 U10.12 | length 8.7
  Bottom Layer w0.5: R28.2 69.511,89.535 70.272,88.774 70.272,88.724 75.431,83.566 U10.12
NetR29_2: R29.2 U10.13 | length 8.7
  Bottom Layer w0.5: R29.2 66.95,89.535 67.711,88.774 67.711,88.724 72.87,83.566 U10.13
NetR30_2: R30.2 U10.9 | length 11.2
  Bottom Layer w0.5: R30.2 74.633,89.535 75.395,88.774 75.395,88.724 78.648,85.471 81.153,85.471 U10.9
NetR31_2: R31.2 U10.11 | length 8.7
  Bottom Layer w0.5: R31.2 72.072,89.535 72.833,88.774 72.833,88.711 U10.11
NetR32_2: R32.2 U10.6 | length 22.5
  Bottom Layer w0.5: U10.6 82.296,80.264 84.599,80.264 86.106,81.771 86.106,85.344 83.67,87.78 81.461,87.78 80.517,88.724 80.517,88.774 79.756,89.535 R32.2
NetR33_2: R33.2 U10.7 | length 21.2
  Bottom Layer w0.5: U10.7 80.698,76.126 80.698,76.888 82.62,78.81 85.541,78.81 87.249,80.518 87.249,85.979 83.693,89.535 R33.2
NetU1_5: U1.5 U6.1 | length 25.6
  Bottom Layer w0.5: U6.1 116.078,52.578 123.825,44.831 132.334,44.831 U1.5
NetU1_6: U1.6 U6.2 | length 25.9
  Bottom Layer w0.5: U6.2 118.618,52.07 124.46,46.228 133.477,46.228 U1.6
NetU1_7: U1.7 U2.2 U6.3 | length 41.8
  Bottom Layer w0.5: U6.3 121.158,51.308 125.023,47.443 139.446,47.443 ; U1.7 139.446,47.443 ; U2.2 150.241,42.947 145.744,47.443 139.446,47.443
NetU2_6: U2.6 U2.10 | length 8.7
  Bottom Layer w0.5: U2.6 160.401,48.006 U2.10
NetU2_14: U2.14 U3.2 | length 6.4
  Bottom Layer w0.5: U3.2 150.241,53.086 U2.14
NetU3_6: U3.6 U6.4 | length 39.8
  Bottom Layer w0.5: U6.4 125.349,54.229 140.97,54.229 144.653,57.912 158.369,57.912 U3.6
NetU5_5: U5.5 U8.1 | length 44.9
  Bottom Layer w0.5: U8.1 125.857,69.469 136.715,69.469 145.478,78.232 154.686,78.232 U5.5
NetU7_2: JU5.1 JU5.2 U7.2 U7.6 | length 8.8
  Bottom Layer w0.5: U7.2 42.004,54.864 JU5.2 ; JU5.1 49.466,54.927 49.466,57.435 U7.6
NetU8_5: U8.5 U9.1 | length 44.8
  Bottom Layer w0.5: U9.1 98.933,69.342 109.093,69.342 118.237,78.486 127,78.486 U8.5
NetU9_5: U9.5 U10.1 | length 46.5
  Bottom Layer w0.5: U10.1 71.755,69.469 82.296,69.469 93.472,80.645 97.79,80.645 U9.5
RESET: D1.2 D2.2 JU6.1 JU6.2 U5.15 U8.15 U9.15 U10.15 | length 283.4
  Bottom Layer w0.5: D1.2 57.069,70.104 ; U10.15 64.262,87.122 57.069,87.122 ; JU6.2 D2.2 D2.2@74.93,52.479 ; JU6.1 69.422,62.404 61.722,70.104 57.069,70.104 ; U9.15 91.567,86.868 91.567,120.777 ; U8.15 118.364,87.122 118.364,120.777 ; U5.15 145.288,87.63 145.288,110.49 135.001,120.777 118.364,120.777 ; 57.069,70.104 57.069,87.122 ; 57.069,87.122 57.069,106.726 71.12,120.777 91.567,120.777 ; 91.567,120.777 118.364,120.777
START: C3.2 U6.5 U7.3 U7.4 | length 88.5
  Bottom Layer w0.5: U7.3 43.18,57.498 ; U7.4 43.18,57.498 ; U6.5 122.514,59.604 C3.2 44.491,59.604 43.18,58.293 43.18,57.498
pads on no net: DS1.5 DS2.5 DS3.5 DS4.5 JDC.3 U1.3 U1.4 U1.9 U1.10 U1.11 U1.12 U1.13 U1.14 U1.15 U2.3 U2.4 U2.5 U2.11 U2.12 U2.13 U3.3 U3.4 U3.5 U3.9 U3.10 U3.11 U3.12 U3.13 U3.14 U3.15 U4.6 U4.7 U4.9 U4.10 U4.11 U4.12 U4.13 U4.14 U4.15 U4.16 U5.4 U5.14 U6.8 U6.9 U6.10 U6.11 U6.12 U6.13 U7.11 U7.12 U7.13 U8.4 U8.14 U9.4 U9.14 U10.4 U10.5 U10.14

## Polygon pours and split planes (outlines as drawn)
GND on Bottom Layer "GND_L02_P000" (solid, pour order 0): 27.94,123.952 173.99,123.952 173.99,27.051 27.94,27.051

## Keep-outs
Keep-Out Layer:
  lines w0.5: 25.4,25.4 176.403,25.4 176.403,126.492 25.4,126.492 25.4,25.4 ; 27.94,27.051 173.99,27.051 173.99,123.952 27.94,123.952 27.94,27.051